# Altium PCB NavigaionBoard2_polygon.PcbDoc
Units mil, origin at the board's own origin, x right, y up, seen from the top; angles counter-clockwise.
Board outline 3645.67 x 3818.9 mil, 2 copper layers (Top Layer, Bottom Layer); 100 components, 74 nets, 445 pads, 133 vias.
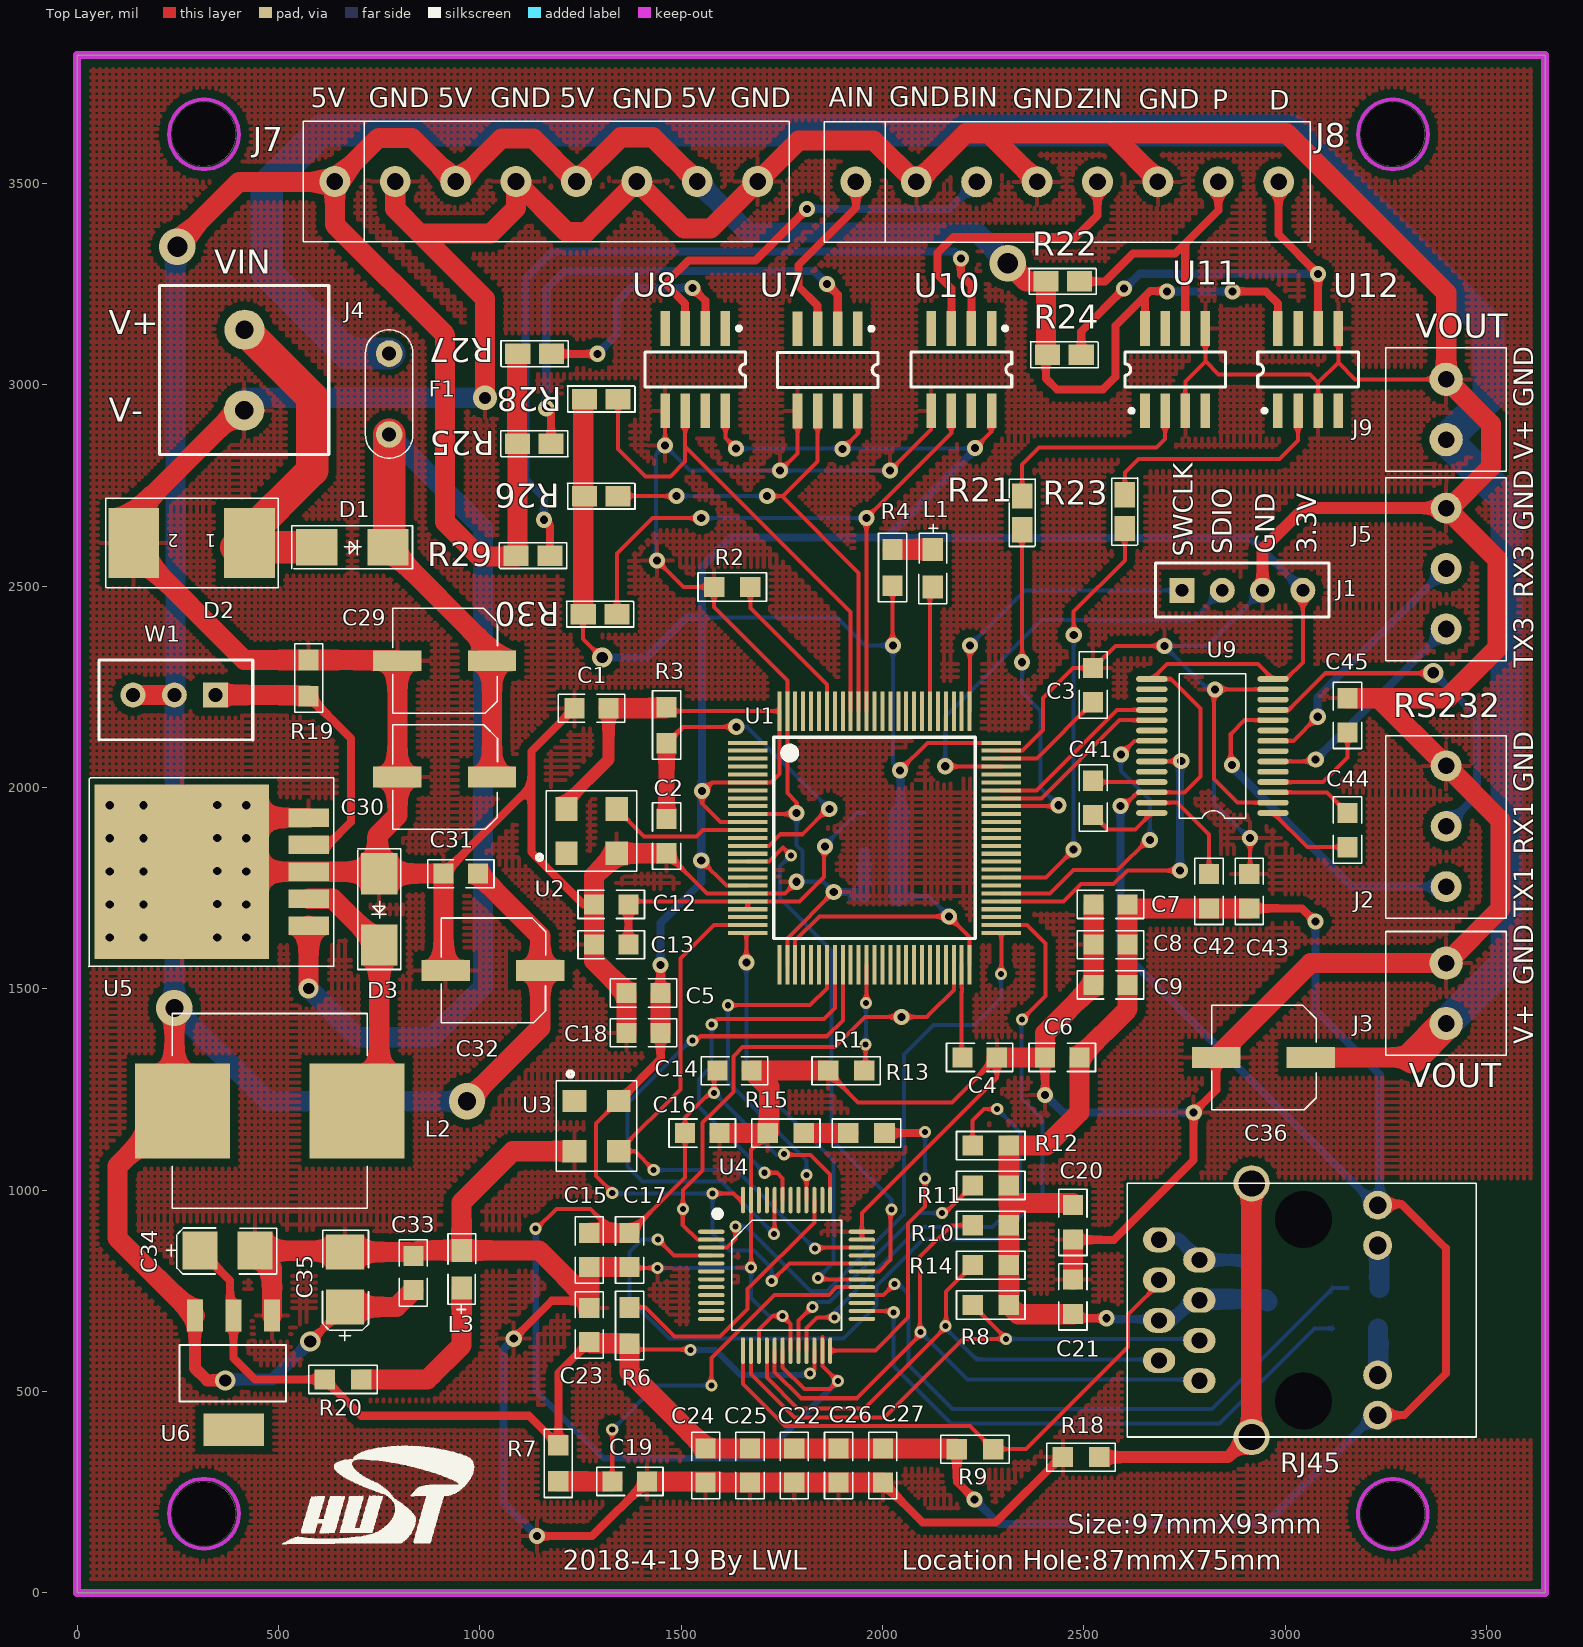
[diagram p0: Top Layer view]
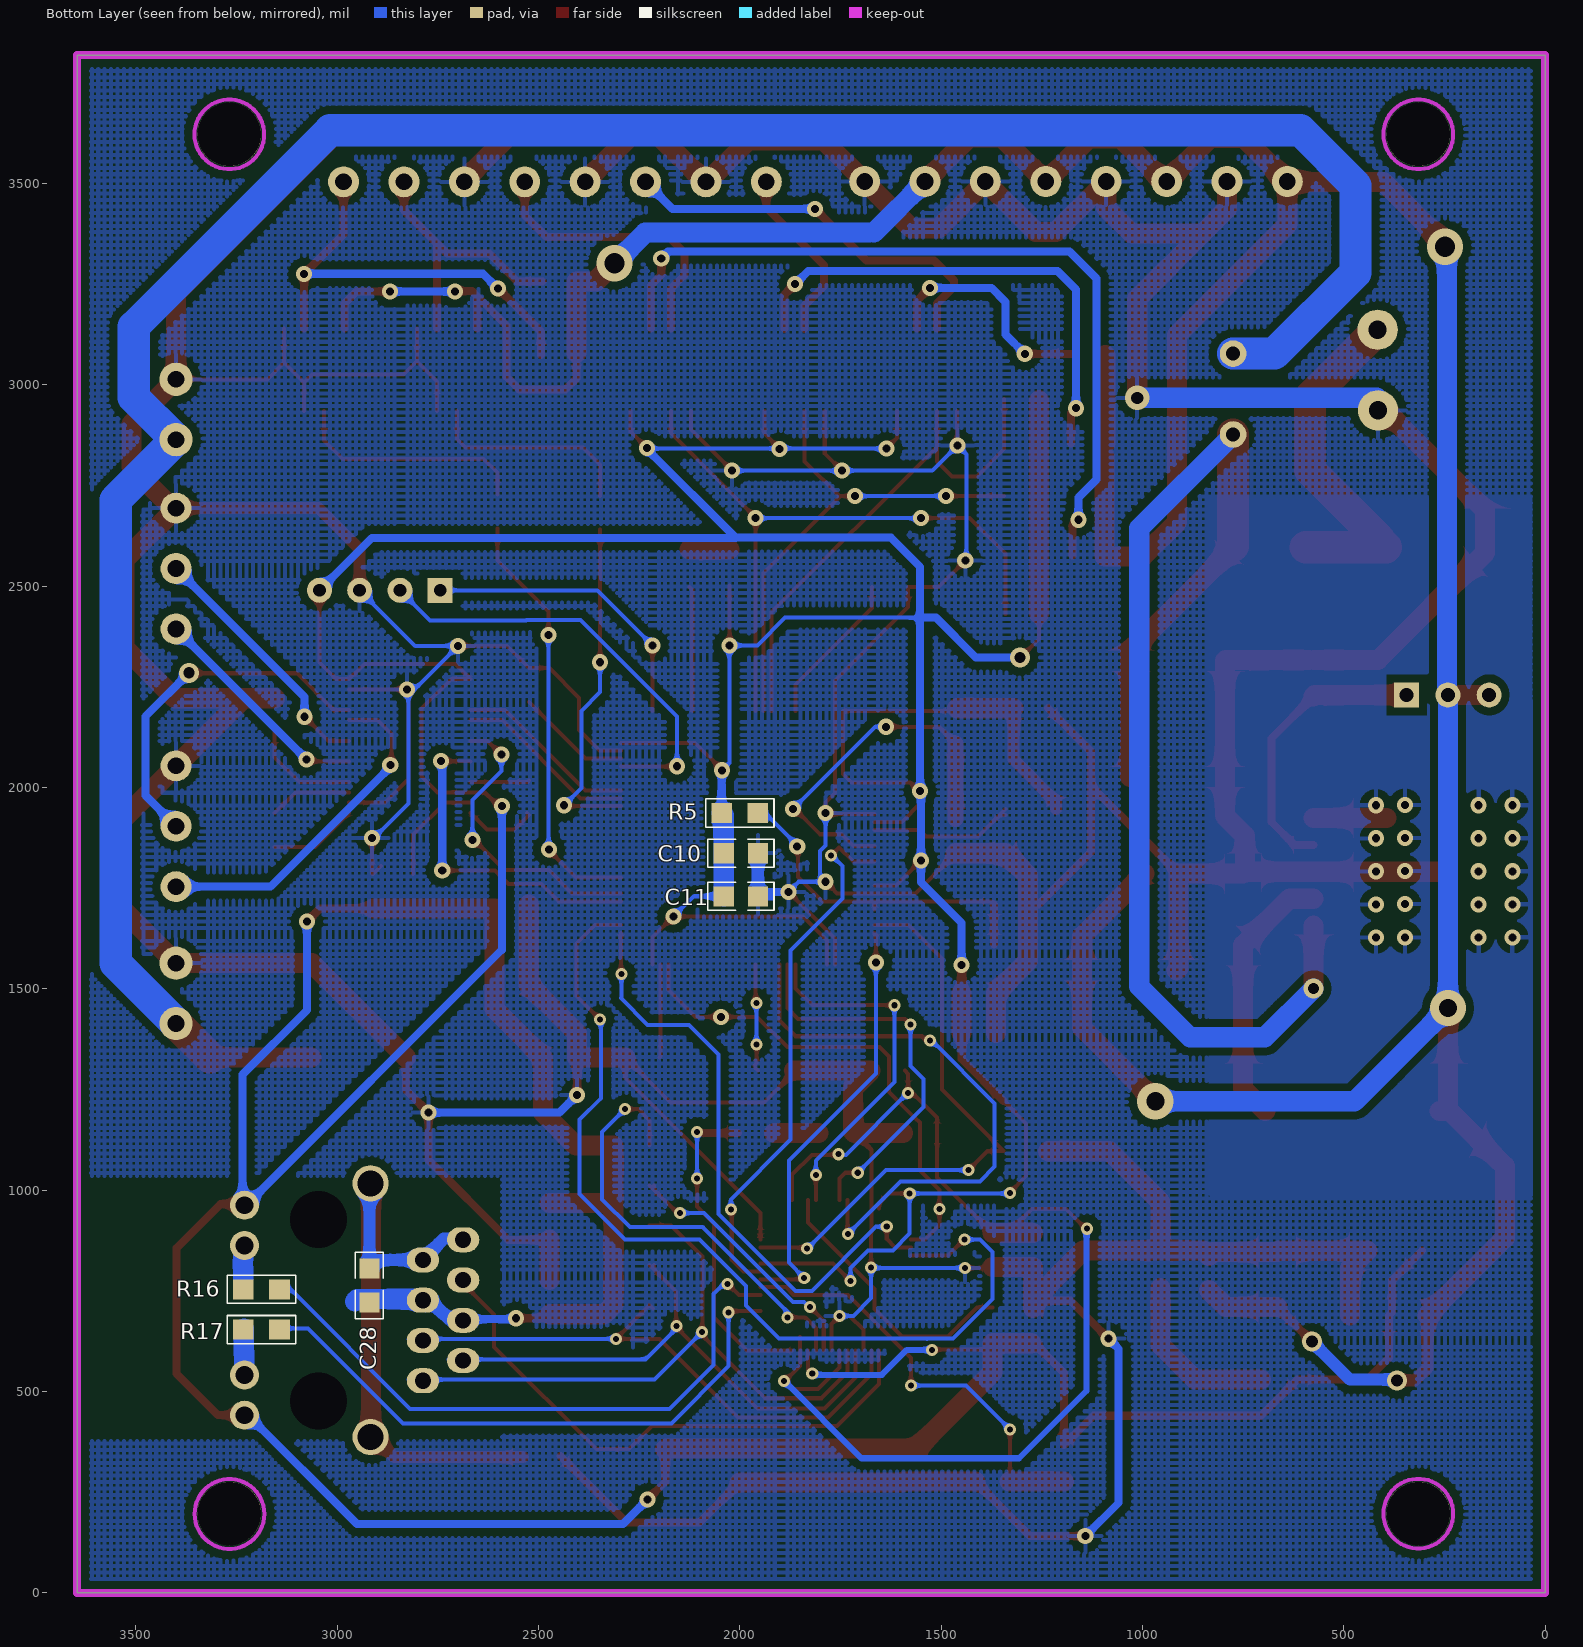
[diagram p1: Bottom Layer view, seen from below]

## Layer stack, top to bottom
Top Layer: signal copper 1.4
Dielectric: dielectric 12.6, FR-4, Dk 4.8
Bottom Layer: signal copper 1.4

## Board outline
0,0 0,3818.9 3645.67,3818.9 3645.67,0

## Design rules (kind name [scope] priority, off if disabled: settings)
Clearance PolyClearance [inpolygon] p1: gap=20
Clearance ViaToVia [isvia vs isvia] p2: gap=30
Clearance [All] p3: gap=8
HoleSize [All] p1: absolutevalues=TRUE maxlimit=196.85 minlimit=1 maxpercent=80.000 minpercent=20.000
PolygonConnect [All] p1: connectstyle=Relief reliefconductorwidth=10 reliefentries=4 polygonreliefangle="90 Angle"
RoutingVias [All] p1: holewidth=20 width=40 viastyle="Through Hole" minholewidth=15 minwidth=30 maxholewidth=50 maxwidth=90
SilkToSilkClearance [All] p1: silktosilkclearance=5
SilkscreenOverComponentPads [IsPad] p1: minsilkscreentomaskgap=5
SolderMaskExpansion [All] p1: expansion=4
Width Width_NETC36_1 [InNet('NetC36_1')] p1: maxlimit=100 minlimit=10 preferedwidth=40
Width Width_DC_IN [InNet('DC_IN')] p2: maxlimit=100 minlimit=10 preferedwidth=50
Width Width_5V [InNet('5V')] p3: maxlimit=100 minlimit=10 preferedwidth=50
Width Width_GND [InNet('GND')] p4: maxlimit=100 minlimit=10 preferedwidth=50
Width Width_3.3V [InNet('3.3V')] p5: maxlimit=100 minlimit=10 preferedwidth=40
Width [All] p6: maxlimit=100 minlimit=10 preferedwidth=10
25 further rules are at their usual default settings.

## Classes and differential pairs
component class serial_com: C41 C42 C43 C44 C45 U9
component class power: C29 C30 C31 C32 C33 C34 C35 C36 D1 D2 D3 F1 L2 L3 R19 R20 U5 U6 W1
component class Navigation_Controll: C28 J2 J3 J4 J5 J7 J8 J9 R16 R17 R18 RJ45
component class ethernet: C14 C15 C16 C17 C18 C19 C20 C21 C22 C23 C24 C25 C26 C27 R6 R7 R8 R9 R10 R11 R12 R13 R14 R15 U3 U4
component class cpu: C1 C2 C3 C4 C5 C6 C7 C8 C9 C10 C11 C12 C13 J1 L1 R1 R2 R3 R4 R5 U1 U2
component class QEP: R21 R22 R23 R24 R25 R26 R27 R28 R29 R30 U7 U8 U10 U11 U12

## Components (designator, comment, footprint, x,y, rotation, side; value= is the part's Value field where it differs from the comment)
C1 "CAP" CAP-0805 1234.96,2196.85 r0 top
C2 "CAP" CAP-0805 1463.96,1836.85 r90 top
C3 "CAP" CAP-0805 2523.26,2296.85 r270 top
C4 "CAP" CAP-0805 2283.96,1329.85 r180 top
C5 "CAP" CAP-0805 1363.96,1489.85 r0 top
C6 "CAP" CAP-0805 2403.96,1329.85 r0 top
C7 "CAP" CAP-0805 2523.96,1709.85 r0 top
C8 "CAP" CAP-0805 2523.96,1609.85 r0 top
C9 "CAP" CAP-0805 2523.96,1509.85 r0 top
C10 "CAP" CAP-0805 1954.96,1836.85 r0 bottom
C11 "CAP" CAP-0805 1954.96,1729.85 r0 bottom
C12 "CAP" CAP-0805 1283.96,1709.85 r0 top
C13 "CAP" CAP-0805 1283.96,1609.85 r0 top
C14 "CAP" CAP-0805 1674.96,1296.85 r180 top
C15 "CAP" CAP-0805 1271.96,808.85 r90 top
C16 "CAP" CAP-0805 1594.96,1141.85 r180 top
C17 "CAP" CAP-0805 1371.96,808.85 r90 top
C18 "CAP" CAP-0805 1363.96,1390.85 r0 top
C19 "CAP" CAP-0805 1414.96,276.85 r180 top
C20 "CAP" CAP-0805 2472.96,877.85 r90 top
C21 "CAP" CAP-0805 2472.96,777.85 r270 top
C22 "CAP" CAP-0805 1780.96,273.85 r90 top
C23 "CAP" CAP-0805 1271.96,707.85 r270 top
C24 "CAP" CAP-0805 1560.96,273.85 r90 top
C25 "CAP" CAP-0805 1670.96,273.85 r90 top
C26 "CAP" CAP-0805 1890.96,273.85 r90 top
C27 "CAP" CAP-0805 2000.96,273.85 r90 top
C28 "CAP" CAP-0805 2920,806 r270 bottom
C29 "CAP 330uF" ECAP_S 1030.26,2314.85 r180 top
C30 "CAP 330uF" ECAP_S 1030.26,2026.15 r180 top
C31 "CAP" CAP-0805 910.26,1786.15 r0 top
C32 "CAP 330uF" ECAP_S 1150.26,1546.15 r180 top
C33 "CAP" CAP-0805 834.96,836.85 r270 top
C34 "CAP 10UF" CAP_B 305.26,850.15 r180 top
C35 "CAP 10UF" CAP_B 665.26,710.15 r270 top
C36 "CAP 330uF" ECAP_S 3063.96,1329.85 r180 top
C41 "CAP" CAP-0805 2523.26,2016.85 r270 top
C42 "CAP" CAP-0805 2810.96,1784.85 r270 top
C43 "CAP" CAP-0805 2910.96,1784.85 r270 top
C44 "CAP" CAP-0805 3154.96,1936.85 r270 top
C45 "CAP" CAP-0805 3154.96,2136.85 r90 top
D1 "SS34" DO214AC 594.96,2596.85 r0 top
D2 "SMBJ12CA" DO214AB 428,2607 r180 top
D3 "SS34" DO214AC 750.26,1786.15 r270 top
F1 "400mA" MF_R030 774.96,2876.85 r90 top
J1 "HDR1*4" HDR1*4 2743.96,2489.85 r0 top
J2 "DG3P" DG381-3P 3399.96,1753.85 r0 top
J3 "DG2P" DG381-2P 3399.96,1413.85 r0 top
J4 "DG2P" DG508-2P 414.96,2936.85 r0 top
J5 "DG3P" DG381-3P 3399.96,2393.85 r0 top
J7 "HDR1*8" KF128L-8P 640,3505 r270 top
J8 "HDR1*8" KF128L-8P 1934,3504 r270 top
J9 "DG2P" DG381-2P 3399.96,3013.85 r180 top
L1 "LED" LED-0805 2125.26,2591.15 r270 top
L2 "INDUCTOR" PWR_L 694.96,1196.85 r180 top
L3 "LED" LED-0805 954.96,756.85 r90 top
R1 "RES" RES-0805 1954.96,1296.85 r180 top
R2 "RES" RES-0805 1672,2498 r180 top
R3 "RES" RES-0805 1463.96,2109.85 r90 top
R4 "RES" RES-0805 2025.26,2501.15 r90 top
R5 "RES" RES-0805 1954.96,1936.85 r0 bottom
R6 "RES" RES-0805 1371.96,708.85 r270 top
R7 "RES" RES-0805 1194.96,276.85 r90 top
R8 "RES" RES-0805 2313.96,714.85 r180 top
R9 "RES" RES-0805 2274.96,356.85 r180 top
R10 "RES" RES-0805 2313.96,912.85 r180 top
R11 "RES" RES-0805 2313.96,1011.85 r180 top
R12 "RES" RES-0805 2313.96,1110.85 r180 top
R13 "RES" RES-0805 1914.96,1141.85 r0 top
R14 "RES" RES-0805 2223.96,813.85 r0 top
R15 "RES" RES-0805 1714.96,1141.85 r0 top
R16 "RES" RES-0805 3142.96,753.85 r0 bottom
R17 "RES" RES-0805 3142.96,653.85 r0 bottom
R18 "RES" RES-0805 2448,337 r0 top
R19 "RES" RES-0805 574.96,2316.85 r270 top
R20 "RES" RES-0805 705.26,530.15 r180 top
R21 "RES" 0805 2347,2637 r90 top
R22 "RES" 0805 2493,3257 r180 top
R23 "RES" 0805 2602,2640 r90 top
R24 "RES" 0805 2497,3075 r180 top
R25 "RES" 0805 1090,2854 r0 top
R26 "RES" 0805 1347,2724 r180 top
R27 "RES" 0805 1091,3077 r0 top
R28 "RES" 0805 1347,2965 r180 top
R29 "RES" 0805 1087,2576 r0 top
R30 "RES" 0805 1344,2431 r180 top
RJ45 "HR91115A" RJ45_ISO 2786.96,526.85 r90 top (schematic designator J6)
U1 "STM32F407VGT6" STM32-LQFP100 1665.26,2111.15 r0 top
U2 "8MHZ" OSC_S 1214.96,1836.85 r0 top
U3 "OSC" OSC_S 1234.96,1221.85 r270 top
U4 "DP83848" LQFP48 1574.96,896.85 r0 top
U5 "LM2596" TO263 574.96,1656.85 r90 top
U6 "AMS117-3V3" AMS1117 485.26,690.15 r180 top
U7 "6N136" SOP8 1864,3037 r180 top
U8 "6N136" SOP8 1535,3038 r180 top
U9 "MAX3237" SSOP28 2969.96,1936.85 r180 top
U10 "6N136" SOP8 2196,3038 r180 top
U11 "6N136" SOP8 2727,3038 r0 top
U12 "6N136" SOP8 3057,3038 r0 top
W1 "RESPOT" RESPOT1 343.96,2229.85 r90 top

## Footprints (in the part's own frame and the unit in brackets; to place one, negate y for a bottom-side part, rotate by r counter-clockwise, add the part's x,y. Pads: shape width x height; smd on the part's side, far side on the other; paste and mask are expansions set on the pad)
0805 [mm]
  rect 1.586x1.294 smd: 1(0.085,0.005) 2(2.215,0.005)
  silkscreen extent -0.97,-0.81 3.28,0.82
AMS1117 [mil]
  rect 40x80 smd: 1(1,1) 2(97,1) 3(193,1)
  rect 150x80 smd: 4(96,285)
  silkscreen extent -34,75 231,215
CAP-0805 [mil]
  rect 50x50 smd: 1(0,0) 2(85,0)
  silkscreen extent -40,-35 125,35
CAP_B [mm]
  rect 2.2x2.4 smd: 1(0,0) 2(-3.465,0.01)
  silkscreen extent -4.83,-1.42 2.14,1.49
DG381-2P [mm]
  round 2.1 hole 1.05: 1(0,0) 2(0,3.81)
  silkscreen extent -3.8,-2 3.8,5.81
DG381-3P [mm]
  round 1.95 hole 1.05: 1(0,0) 2(0,3.81) 3(0,7.62)
  silkscreen extent -3.8,-2 3.8,9.53
DG508-2P [mil]
  round 100 hole 45: 1(0,0) 2(1,200)
  silkscreen extent -210,-110 210,310
DO214AB [mm]
  rect 3.2x4.4 smd: 1(0,0) 2(7.305,0)
  silkscreen extent -1.82,-2.84 9.05,2.82
DO214AC [mm]
  rect 2.6x2.3 smd: 1(0,0) 2(4.505,0)
  silkscreen extent -1.58,-1.35 6.04,1.35
ECAP_S [mil]
  rect 120x52 smd: 1(0,0) 2(235,0)
  silkscreen extent -14,-130 246,130
HDR1*4 [mil]
  rect 62x62 hole 32: 1(0,0)
  round 62 hole 32: 2(100,0) 3(200,0) 4(300,0)
  silkscreen extent -66,-66 365,68
KF128L-8P [mm]
  round 1.95 hole 1.05: 1(0,0) 2(0,3.81) 3(0,7.62) 4(0,11.43) 5(0,15.24) 6(0,19.05) 7(0,22.86) 8(0,26.67)
  silkscreen extent -3.8,-2 3.8,28.67
LED-0805 [mm]
  rect 1.45x1.3 smd: 1(0,0) 2(2.379,0)
  silkscreen extent -1.6,-0.89 3.43,0.86
LQFP48 [mil]
  oval 66x10 smd: 1(0,0) 2(0,-19.68) 3(0,-39.37) 4(0,-59.06) 5(0,-78.74) 6(0,-98.42) 7(0,-118.11) 8(0,-137.8) 9(0,-157.48) 10(0,-177.16) 11(0,-196.85) 12(0,-216.54) 25(374.01,-216.54) 26(374.01,-196.85) 27(374.01,-177.16) 28(374.01,-157.48) 29(374.01,-137.8) 30(374.01,-118.11) 31(374.01,-98.42) 32(374.01,-78.74) 33(374.01,-59.06) 34(374.01,-39.37) 35(374.01,-19.68) 36(374.01,0)
  oval 10x66 smd: 13(78.74,-295.28) 14(98.42,-295.28) 15(118.11,-295.28) 16(137.79,-295.28) 17(157.48,-295.28) 18(177.16,-295.28) 19(196.85,-295.28) 20(216.53,-295.28) 21(236.22,-295.28) 22(255.9,-295.28) 23(275.59,-295.28) 24(295.27,-295.28) 37(295.27,78.74) 38(275.59,78.74) 39(255.9,78.74) 40(236.22,78.74) 41(216.53,78.74) 42(196.85,78.74) 43(177.16,78.74) 44(157.48,78.74) 45(137.79,78.74) 46(118.11,78.74) 47(98.42,78.74) 48(78.74,78.74)
  silkscreen extent 8,-245 323,53
MF_R030 [mm]
  round 1.68 hole 0.886: 1(0,0) 2(5.1,0)
  silkscreen extent -1.5,-1.5 6.6,1.5
OSC_S [mm]
  rect 1.4x1.5 smd: 1(0,0) 2(3.175,0) 3(3.175,2.794) 4(0,2.794)
  silkscreen extent -1.86,-1.14 4.45,3.94
PWR_L [mm]
  rect 6x6 smd: 1(0,0) 2(11,0)
  silkscreen extent -0.65,-6.15 11.65,6.15
RES-0805 [mm]
  rect 1.3x1.27 smd: 1(0,0) 2(2.286,0)
  silkscreen extent -1.02,-0.89 3.3,0.89
RESPOT1 [mil]
  rect 62x62 hole 35 paste+0: 1(0,0)
  round 62 hole 35: 2(0,205) 3(0,102.5)
  silkscreen extent -111,-92 87,290
RJ45_ISO [mil]
  round 70.8 hole 141.73: 0(-50.39,-259.05)
  round 60 hole 141.73: 0(400.39,-259.05)
  oval 62x80 hole 40: 1(0,0) 2(50,100) 3(100,0) 4(150,100) 5(200,0) 6(250,100) 7(300,0) 8(350,100)
  round 72 hole 44: 9(-85.63,-442.91) 10(14,-442.91) 11(335.87,-442.91) 12(436,-442.91)
  round 90 hole 65: 13(-139.76,-129.92) 14(490.16,-129.92)
  silkscreen extent -140,-687 490,179
SOP8 [mm] "Small Outline; 8 Leads; Body Width 4.3 mm; Pitch 1.27 mm"
  rect 0.6x2.2 smd: 1(-1.905,-2.6) 2(-0.635,-2.6) 3(0.635,-2.6) 4(1.905,-2.6) 5(1.905,2.6) 6(0.635,2.6) 7(-0.635,2.6) 8(-1.905,2.6)
  silkscreen extent -3.17,-2.72 3.17,1.1
SSOP28 [mm]
  oval 1.98x0.36 smd: 1(0,0) 2(0,-0.65) 3(0,-1.3) 4(0,-1.95) 5(0,-2.6) 6(0,-3.25) 7(0,-3.9) 8(0,-4.55) 9(0,-5.2) 10(0,-5.85) 11(0,-6.5) 12(0,-7.15) 13(0,-7.8) 14(0,-8.45) 15(7.65,-8.45) 16(7.65,-7.8) 17(7.65,-7.15) 18(7.65,-6.5) 19(7.65,-5.85) 20(7.65,-5.2) 21(7.65,-4.55) 22(7.65,-3.9) 23(7.65,-3.25) 24(7.65,-2.6) 25(7.65,-1.95) 26(7.65,-1.3) 27(7.65,-0.65) 28(7.65,0)
  silkscreen extent 1.73,-8.78 5.92,0.33
STM32-LQFP100 [mm]
  rect 2.5x0.254 smd: 1(0,0) 2(0,-0.5) 3(0,-1) 4(0,-1.5) 5(0,-2) 6(0,-2.5) 7(0,-3) 8(0,-3.5) 9(0,-4) 10(0,-4.5) 11(0,-5) 12(0,-5.5) 13(0,-6) 14(0,-6.5) 15(0,-7) 16(0,-7.5) 17(0,-8) 18(0,-8.5) 19(0,-9) 20(0,-9.5) 21(0,-10) 22(0,-10.5) 23(0,-11) 24(0,-11.5) 25(0,-12) 51(16,-12) 52(16,-11.5) 53(16,-11) 54(16,-10.5) 55(16,-10) 56(16,-9.5) 57(16,-9) 58(16,-8.5) 59(16,-8) 60(16,-7.5) 61(16,-7) 62(16,-6.5) 63(16,-6) 64(16,-5.5) 65(16,-5) 66(16,-4.5) 67(16,-4) 68(16,-3.5) 69(16,-3) 70(16,-2.5) 71(16,-2) 72(16,-1.5) 73(16,-1) 74(16,-0.5) 75(16,0)
  rect 0.254x2.5 smd: 26(2,-14) 27(2.5,-14) 28(3,-14) 29(3.5,-14) 30(4,-14) 31(4.5,-14) 32(5,-14) 33(5.5,-14) 34(6,-14) 35(6.5,-14) 36(7,-14) 37(7.5,-14) 38(8,-14) 39(8.5,-14) 40(9,-14) 41(9.5,-14) 42(10,-14) 43(10.5,-14) 44(11,-14) 45(11.5,-14) 46(12,-14) 47(12.5,-14) 48(13,-14) 49(13.5,-14) 50(14,-14) 76(14,2) 77(13.5,2) 78(13,2) 79(12.5,2) 80(12,2) 81(11.5,2) 82(11,2) 83(10.5,2) 84(10,2) 85(9.5,2) 86(9,2) 87(8.5,2) 88(8,2) 89(7.5,2) 90(7,2) 91(6.5,2) 92(6,2) 93(5.5,2) 94(5,2) 95(4.5,2) 96(4,2) 97(3.5,2) 98(3,2) 99(2.5,2) 100(2,2)
  silkscreen extent 1.65,-12.35 14.35,0.35
TO263 [mm]
  rect 11x11 smd: 0(3.4,8)
  rect 1.168x2.54 smd: 1(0,0) 2(1.7,0) 3(3.4,0) 4(5.1,0) 5(6.8,0)
  silkscreen extent -2.57,-1.6 9.34,13.87

## Part data
D2: library part SMBJ30CA
F1: library part MF_R030
RJ45: library part NET_PORT
U2: library part OSC
U5: library part LM2576/96
U7 U8 U10 U11 U12: library part Component_1

## Free pads (board coordinates)
  round 157.48 hole 157.48: 1(314.96,196.85) 2(3267.72,196.85) 3(3267.72,3622.05) 4(314.96,3622.05)

## Via types
v1: diameter 40, hole 20, Top Layer to Bottom Layer, 80 vias
v2: diameter 30, hole 15, Top Layer to Bottom Layer, 43 vias
v3: diameter 50, hole 28, Top Layer to Bottom Layer, 3 vias
v4: diameter 90, hole 50, Top Layer to Bottom Layer, 2 vias
v5: diameter 50, hole 30, Top Layer to Bottom Layer, 2 vias
v6: diameter 90, hole 45, Top Layer to Bottom Layer, 2 vias
v7: diameter 60, hole 30, Top Layer to Bottom Layer, 1 vias

## Nets (pads, with @x,y where several pads share a name; then routed paths per layer and width w, separated by ;. In a path a pad name is that pad's centre, name@x,y a point inside that pad or via, vN(x,y) a via of type N, cw(c..) or ccw(c..) an arc to the next point about the centre after c; other vN are vias at no path point)
3.3V: C1.2 C5.2 C6.2 C7.2 C8.2 C9.2 C10.2 C11.2 C18.2 C20.2 C21.2 C22.2 C23.2 C24.2 C25.2 C26.2 C27.2 C28.2 C34.1 C42.2 C43.2 J1.4 R3.2 R4.1 R5.2 R6.2 R7.2 R8.1 R9.2 R10.1 R11.1 R12.1 R14.2 R20.2 R26.2 R28.2 R30.2 RJ45.4 RJ45.5 RJ45.9 RJ45.12 U1.6 U1.11 U1.19 U1.28 U1.50 U1.75 U1.100 U2.4 U3.4 U4.22 U4.32 U4.48 U6.2 U7.8 U8.8 U9.14 U9.15 U9.26 U10.8 | length 20886.4
  Top Layer w10: R30.2 1256.8,2369.2 v3@1303,2323 ; v2(1328.96,992.85) 1328.96,994.85 1288.96,1034.85 1288.96,1165.85 U3.4 ; R6.2 1386.44,604.37 v2@1523,604.37 ; R3.2@1460.96,2196.85 R3.2 1473.92,2189.89 U1.100 1744,2033.89 1722.83,2012.72 U1.6 1576.83,2012.72 v1@1558.46,1994.35 ; v1(1549.96,1819.21) 1612.35,1756.82 U1.19 ; v1@1551.96,2000.85 v1(1551.96,1991.85) 1551.96,1959.85 1597.51,1914.3 U1.11 ; v2(1578,991.85) 1630.52,991.85 U4.48@1650.24,972.13 ; U8.8 1610,2868 v1(1636,2842) ; U4.48@1653.7,954.11 U4.48@1653.7,968.67 ; v2(1725,774.37) 1768.74,818.11 U4.32 ; U1.28 1783.37,1619.91 1843.31,1679.85 v1(2164.96,1679.85) 2216.44,1628.37 U1.50 ; v2(1820,544.37) 1830.87,555.24 U4.22 ; v1(1901,2841) 1939,2879 U7.8 ; R4.1 2025.26,2353.55 v1(2025.96,2352.85) ; v1@2043.46,2043.35 2111.26,2111.15 U1.75 ; v1(2230,2843) 2271,2884 U10.8 ; C7.2@2597.96,1720.85 2608.96,1699.85 2608.96,1680.85 ; v1@2606.96,1961.85 2633.14,1988.03 U9.26 2750.14,1988.03 2789.96,2027.85 2789.96,2195.85 2716.28,2269.53 U9.15 2706.25,2307 2932.49,2307 U9.14 3002.53,2269.53 3043.96,2310.96 J1.4
  Top Layer w20: C34.1 379.96,775.45 379.96,697.45 U6.2 388.26,583.55 441.66,530.15 R20.2 705.56,439.85 1077.96,439.85 ; 1088.96,439.85 1077.96,439.85 ; C23.2 1194.96,545.85 R7.2 1121.96,439.85 1077.96,439.85 ; U3.4 1448.96,1325.85 C18.2 ; C5.2 v1(1448.96,1558.85) ; R9.2 2184.96,275.85 v1(2228.9,231.91) v1@2236.46,224.35 ; C21.2 2483.81,682 v1(2556,682) ; C43.2 3042.15,1699.85 v1(3075,1667) ; RJ45.9 3295.87,441.22 3399,544.35 3399,856 3289.15,965.85 RJ45.12@3229.87,965.85
  Top Layer w30: U2.4 1214.96,1964.85 1319.96,2069.85 C1.2
  Top Layer w50: R30.2 R28.2@1256.8,2961.8 ; C23.2@1275.96,619.85 R6.2@1371.96,619.85 ; C1.2 R3.2@1460.96,2196.85 ; R6.2 1371.96,547.85 C24.2 C25.2 C22.2 C26.2 C27.2 2182.96,358.85 R9.2 ; C18.2 C5.2 ; C21.2@2472.96,691.85 2336.96,691.85 R8.1 R14.2 R10.1 2313.96,958.85 ; C20.2@2472.96,967.85 2322.96,967.85 2313.96,958.85 ; 2608.96,1680.85 C8.2 C9.2 2608.96,1449.85 C6.2 2488.96,1192.85 2406.96,1110.85 R12.1 R11.1 2313.96,958.85 ; C7.2@2608.96,1699.85 C42.2@2800.96,1699.85 ; C42.2 C43.2
  Bottom Layer w10: v2(1328.96,992.85) 1329.96,991.85 v2(1578,991.85) ; v1@1549.96,1984.85 1551.96,1986.85 v1(1551.96,1991.85) v1@1551.96,2000.85 ; 1551.96,2422 1887.37,2422 1956.52,2352.85 v1(2025.96,2352.85) 2025.96,2060.85 v1(2043.96,2042.85) ; v2@1578,977.37 v2(1578,991.85) ; v1(1636,2842) v1@2231,2842 ; v2(1725,774.37) 1725,806.37 1681,850.37 1620,850.37 1578,892.37 v2(1578,991.85) ; C11.2 2114.96,1729.85 v1(2164.96,1679.85) ; R5.2 R5.2@2044.96,1950.85
  Bottom Layer w15: v2(1523,603.37) 1585,603.37 1647,541.37 v2@1820,541.37
  Bottom Layer w20: v3(1304,2323) 1414,2323 1513,2422 1556,2422 ; v1(1448.96,1558.85) 1448.96,1663.85 1549.96,1764.85 v1(1549.96,1819.21) v1@1549.96,1984.85 ; v1(1551.96,1991.85) 1551.96,2421.37 ; 1551.96,2422 1551.96,2547.96 1625,2621 2011,2621 v1@2230,2840 ; 2011,2620 2913.81,2620 J1.4 ; v1(2043.96,2042.85) 2044.96,2041.85 R5.2 ; v1(2228.9,231.91) 2289.96,170.85 2950.85,170.85 RJ45.9@3224.22,444.22 ; v1@2558.15,679.85 RJ45.4@2722.96,679.85 ; v1(2590.96,1953.85) 2590.96,1597.04 3235,953 3235,1287 3075,1447 v1(3075,1667)
  Bottom Layer w30: v1(2556,682) v1@2558.15,679.85 ; RJ45.4@2722.96,679.85 2772.96,729.85 RJ45.5@2822.96,729.85
  Bottom Layer w50: C11.2 C10.2 2039.96,1931.85 R5.2 ; RJ45.5@2822.96,729.85 2950.15,729.85 2956,724
5V: C31.2 C32.1 C33.2 C35.1 J7.1 J7.3 J7.5 J7.7 L2.2 R22.2 R24.2 R25.1 R27.1 R29.1 U6.3 U11.8 U12.8 W1.2 W1.3 | length 10592.7
  Top Layer w20: v5(578.96,623.85) C35.1 ; R24.2@2405.8,3078.8 2405.8,3016.2 2433,2989 2548,2989 2579,3020 2579,3147 2652,3220 ; U11.8 2652,3220 ; v1@2706,3233 2665,3233 2652,3220 ; v1(2869,3232) 2952,3232 2982,3202 U12.8
  Top Layer w30: U6.3 292.26,558.55 322.96,527.85 v5(367.96,527.85)
  Top Layer w50: W1.2 W1.3 ; v6(241.46,1452.35) 241.46,1204.35 L2.2@248.96,1196.85 ; v4@248.96,3350.96 402,3504 J7.1@649,3504 ; L2.2 L2.2@248.96,1196.85 ; U6.3 99.96,881.45 99.96,1059.85 236.96,1196.85 L2.2@248.96,1196.85 ; C35.1 793.26,710.15 C33.2 ; 823,3613 748,3613 J7.1 640,3398 914,3124 914,2659 998.8,2574.2 1094,2574.2 1094,2823 ; 832,3613 943.5,3501.5 1054,3612 1133,3612 J7.5 1350,3615 1430,3615 J7.7 ; v6(967.96,1220.85) 1150.26,1403.15 C32.1 1150.26,1631.15 C31.2 ; R25.1@1092.35,2854.2 R27.1@1092.35,3074.2 ; v4(2311,3302) 2356.2,3256.8 R22.2 R24.2@2405.8,3078.8
  Bottom Layer w20: v1(2707,3232) v1(2869,3232)
  Bottom Layer w30: v5@369.96,529.85 484.96,529.85 v5(578.96,623.85)
  Bottom Layer w50: W1.3 v6(241.46,1452.35) 472.96,1220.85 v6(967.96,1220.85) ; W1.3@243.96,2229.85 v4@243.96,3329.85 ; J7.7 1667,3378 ; 1678,3378 2235,3378 v4@2309.5,3303.5
  other v4: 248.96,3342.85
AIN: J8.1 U7.3 | length 443.8
  Top Layer w20: U7.3 1839,3197 1791,3245 1791,3297 1934,3440 J8.1
BIN: J8.3 U8.3 | length 1003.5
  Top Layer w20: U8.3 1510,3202 1468,3244 1468,3259 1518,3309 1685,3309 v1(1813,3437)
  Bottom Layer w20: v1(1813,3437) 2167,3437 J8.3
CLK_8M: U1.12 U2.3 | length 387.5
  Top Layer w10: U2.3@1339.96,1932.32 cw(c1339.96,1897.25) U2.3@1364.76,1922.05 ; U2.3 1407.96,1878.85 1537.96,1878.85 1553.72,1894.61 U1.12
CLK_50M: U1.24 U3.3 U4.34 | length 1437.3
  Top Layer w10: v2@1429.96,1051.85 v2(1431.96,1049.85) ; v2@1430.96,1049.85 v2(1431.96,1049.85) ; U1.24 1581.5,1658.39 1498,1574.89 1498,1249.89 U3.3 1384.96,1096.85 v2(1431.96,1049.85) ; v2@1846.96,856.85 1847.59,857.48 U4.34
  Bottom Layer w10: v2(1431.96,1049.85) 1636.96,1049.85 v2@1832.46,854.35
  other v2: 1832.96,854.85
CRS_DV: U1.32 U4.40 | length 891.3
  Top Layer w10: v2@1615,1459.37 1820,1459.37 1862.11,1501.48 U1.32 ; U4.40 1811.18,1014.55 ; v2(1811.18,1037.65) 1811.18,1014.55 ; 1812,1015.37 1811.18,1014.55
  Bottom Layer w10: v2(1616,1459.37) 1616,1268.37 1811.18,1073.19 v2(1811.18,1037.65) v2@1811.18,1035.19
DC_IN: C29.1 C30.1 D1.2 F1.1 U5.1 | length 3113.7
  Top Layer w50: v3(574.96,1500.85) U5.1 ; D1.2 1030.26,2338.91 C29.1 C30.1
  Top Layer w80: D1.2@774.96,2599.49 F1.1
  Bottom Layer w50: v3(574.96,1500.85) 695.96,1379.85 881.96,1379.85 1007.96,1505.85 1007.96,2643.85 F1.1
DIR_OUT: J8.8 R24.1 U12.6 | length 1108.8
  Top Layer w20: R24.1 2493.65,3132.65 v1(2600,3239) ; J8.8 2984,3373 v1(3082,3275) U12.6
  Bottom Layer w20: v1@2601,3239 2638,3276 v1@3082,3276
GND: C1.1 C2.1 C3.1 C4.1 C5.1 C6.1 C7.1 C8.1 C9.1 C10.1 C11.1 C12.1 C13.1 C14.1 C15.1 C16.1 C17.1 C18.1 C19.1 C20.1 C21.1 C22.1 C23.1 C24.1 C25.1 C26.1 C27.1 C29.2 C30.2 C31.1 C32.2 C33.1 C34.2 C35.2 C36.2 C43.1 C45.2 D2.2 D3.1 J1.3 J2.3 J3.2 J4.1 J5.3 J7.2 J7.4 J7.6 J7.8 J8.2 J8.4 J8.6 J9.1 L3.2 R1.2 R2.2 R15.1 R18.1 R19.1 U1.10 U1.20 U1.27 U1.74 U1.99 U2.2 U3.2 U4.15 U4.19 U4.35 U4.36 U4.47 U5.0 U5.3 U5.5 U6.1 U7.5 U8.5 U9.2 U9.13 U10.5 U11.3 U11.5 U12.3 U12.5 | length 27415.2
  Top Layer w10: C17.1 1373.96,806.85 v2(1440.96,806.85) ; v1(1440,2564) 1506,2498 R2.2 1582,2448 1763.68,2266.32 U1.99 1763.68,1985.85 1786.96,1962.57 v1(1786.96,1936.85) 1784.09,1933.98 1718.96,1933.98 ; v1@1460,2855 U8.5 ; C2.1 1563.68,1737.13 U1.20 1758.13,1737.13 1771.61,1750.61 ; U1.10 1718.96,1933.98 ; v2(1673.96,808.37) U4.47 1673.39,1100.28 R15.1 ; U4.15 1693.07,653.96 1726.96,687.85 v2(1751.96,687.85) 1771.81,668 U4.19 ; R15.1@1714.96,1150.85 R15.1 ; R15.1@1718.96,1145.85 R15.1 ; 1728.09,1933.98 1718.96,1933.98 ; v1(1746,2787) 1789,2830 U7.5 ; U1.27 1763.68,1625.68 v1(1879,1741) ; R1.2@1855.96,1309.85 R1.2@1873.96,1309.85 ; 1913.64,1244.17 1939.81,1218 2172.11,1218 C4.1 2283.96,1278.96 1948.98,943.98 U4.36 U4.35 ; v1(2019,2787) 2121,2889 U10.5 ; U1.74 2348.09,2091.46 2398.96,2142.33 2398.96,2222.85 2472.96,2296.85 C3.1 2578.26,2351.85 v1(2699.96,2351.85) ; U11.3 2752,3008 2802,3058 U11.5 ; 2803,3058 2835,3026 3062,3026 3082,3006 ; v1@2822.96,2236.85 2822.96,2020.85 2881.37,1962.44 U9.2 ; v1(2826.05,2243.94) U9.13 ; C43.1@2890.96,1804.85 C43.1 2912.96,1786.85 v1(2912.96,1874.85) ; J1.3 2943.96,2557.85 ; U12.3 3082,3006 ; 3132,3055 3173.15,3013.85 J9.1 ; U12.5 3132,3056 3082,3006
  Top Layer w20: C31.1 1127.96,2003.85 ; v1(1084.3,631.19) 1178.62,725.51 C23.1@1271.96,725.51 ; v1(1141.96,140.85) 1278.96,140.85 C19.1 ; C1.1 1127.96,2089.85 1127.96,2003.85 ; C12.1 1257.96,1709.85 1127.96,1839.85 1127.96,2003.85 ; C27.1 2099.96,174.85 2280.85,174.85 R18.1@2445.5,339.5 ; v1(2403.96,1236.85) C6.1 ; C20.1@2473,876.85 2574.96,876.85 2772.96,1074.85 v1(2772.96,1192.85) 2828.96,1248.85 C36.2
  Top Layer w30: J1.3 2943.96,2591.85 3045.96,2693.85 J5.3
  Top Layer w50: U5.0 U5.3 D3.1@745.7,1790.71 ; U5.0@393.86,1924.57 U5.5 ; J4.1@397.85,2936.85 149,2688 149,2583 415.15,2316.85 R19.1 ; U6.1 484.26,807.17 C34.2 662.46,849.76 C35.2 C33.1@825.24,846.57 ; R19.1@586.96,2316.85 C29.2@793.26,2316.85 ; J7.2 790,3437 851,3376 ; C29.2 C30.2 795.26,1930.15 745.7,1880.59 D3.1@745.7,1790.71 ; C33.1 848.62,850.51 L3.2 ; C32.2 910.26,1551.15 C31.1 D3.1 D3.1@745.7,1790.71 ; v7(1013,2967.85) 1013,3214 851,3376 ; U3.2 1081.96,1096.85 954.96,969.85 L3.2 ; C23.1 C23.1@1271.96,725.51 ; C18.1 C5.1 1283.96,1569.85 C13.1 C12.1 1283.96,1780.85 U2.2 C2.1 ; C17.1 C15.1 C23.1@1271.96,725.51 ; C19.1 1593.96,276.85 1596.96,273.85 C25.1 C22.1 C26.1 C27.1 ; C16.1 R15.1 ; 1714.96,1256.85 C14.1 R1.2 ; R15.1@1718.96,1145.85 1718.96,1256.85 ; J8.2@2083.61,3501.61 1978.22,3607 1792,3607 J7.8 1573,3388 1507,3388 J7.6 1265,3380 1215,3380 J7.4 1090,3439 1027,3376 851,3376 ; J8.2@2084,3502 2207,3625 3003.81,3625 3399.96,3228.85 J9.1 3510.96,2902.85 3510.96,2795.96 J5.3@3408.85,2693.85 ; 2273,3616 J8.4@2381,3508 ; C4.1 C6.1 2403.96,1389.85 C9.1 C8.1 C7.1 ; C21.1@2473,776.85 C20.1@2473,876.85 ; 2565,3627 J8.6@2684,3508 ; C36.2 3062.96,1563.85 J3.2 3534.96,1698.85 3534.96,1918.85 J2.3 3231.96,2221.85 ; C45.2 3231.96,2221.85 ; J5.3 3527.96,2565.85 3527.96,2346.85 3402.96,2221.85 3231.96,2221.85 ; L3.2 1146.96,850.51 C23.1@1271.96,725.51
  Bottom Layer w10: v1@1437.5,2566.5 1437.5,2827.5 v1(1459.5,2849.5) 1522,2787 v1(1746,2787) v1@2018,2787 ; v2(1440.96,806.85) v2@1663.96,806.85 ; v2(1673.96,808.37) 1673.96,731.85 1717.96,687.85 v2(1751.96,687.85) ; v1(1786.96,1936.85) 1786.96,1856.64 1801,1842.6 1801,1780 v1(1787,1766) ; v1@1790,1766 v1(1787,1766) ; v1(1879,1741) 1854,1766 v1(1787,1766) ; v1@2822.96,2236.85 2822.96,1960.85 v1@2908.96,1874.85 ; v1(2826.05,2243.94) 2807.87,2243.94 v1(2699.96,2351.85) 2805.96,2351.85 J1.3
  Bottom Layer w20: J4.1@419.96,2936.85 J4.1@427.96,2944.85 ; v1(1084.3,631.19) 1058.96,605.85 1058.96,223.85 v1(1141.96,140.85) ; v1@1885,1741 1943.81,1741 C11.1 ; v1(2403.96,1236.85) 2447.96,1192.85 v1(2772.96,1192.85)
  Bottom Layer w30: C11.1 C10.1
  Bottom Layer w50: J4.1@417.96,2967.85 v7(1013,2967.85)
  other v1: 81,1628 165,1628 348,1628 420,1628 81,1710 165,1710 420,1710 348,1711 81,1792 165,1792 420,1792 348,1793 81,1874 165,1874 420,1874 348,1875 81,1956 165,1956 420,1956 348,1957
LED: L1.2 U1.81 | length 310.6
  Top Layer w10: U1.81 2118.02,2490.24 L1.2
LED_ACT: R17.2 RJ45.10 | length 116
  Bottom Layer w50: RJ45.10@3231,540.85 R17.2@3231,656.85
LED_LINK: R16.2 RJ45.11 | length 105.9
  Bottom Layer w50: R16.2@3234,756.85 RJ45.11@3234,862.72
MDC: U1.16 U4.31 | length 1344
  Top Layer w10: U1.16 1718.17,1815.87 1753.15,1850.85 v2(1773,1831) ; U4.31 1991.06,798.43 2019.96,827.33 v2@2019.96,951.85
  Bottom Layer w10: v2@1772.06,1831.94 1745,1804.89 1745,1724.14 1874,1595.14 1874,1125.37 2021.96,977.41 v2(2021.96,951.85)
MDIO: U1.25 U4.30 | length 1072.6
  Top Layer w10: v1(1661.96,1565.37) 1661.96,1635.41 U1.25 ; v2(1840,782) 1843.26,778.74 U4.30
  Bottom Layer w10: v1@1661.96,1564.37 1661.96,1289.41 1878,1073.37 1878,820 v2(1840,782)
NetC2_2: C2.2 R3.1 U1.14 | length 934.5
  Top Layer w10: R3.1 1504.96,2150.85 v1(1637,2150.85) ; U1.14 1718.17,1855.24 1747,1884.07 1747,1884 1801.11,1884 v1@1866.96,1949.85
  Top Layer w40: C2.2 R3.1
  Bottom Layer w10: v1(1637,2150.85) 1663.96,2150.85 v1(1867.96,1946.85)
NetC3_2: C3.2 U1.73 | length 286.1
  Top Layer w10: U1.73 2383.19,2071.78 C3.2
NetC4_2: C4.2 U1.49 | length 231.4
  Top Layer w10: U1.49 2196.76,1503.21 2197.14,1502.83 2197.14,1492.06 2196.76,1491.67 2196.76,1332.06 C4.2
NetC12_2: C12.2 C13.2 R5.1 U1.21 U1.22 | length 844.8
  Top Layer w10: C12.2 1376.56,1717.45 U1.21 ; U1.22 U1.21 ; v1@1855.38,1855.27 1855.38,1778.38 1794.45,1717.45 U1.21
  Top Layer w20: C13.2 C12.2
  Bottom Layer w10: v1@1855.38,1855.27 1936.96,1936.85 R5.1
  other v1: 1857.38,1853.27
NetC28_1: C28.1 R18.2 RJ45.7 RJ45.8 RJ45.13 RJ45.14 | length 1496.9
  Top Layer w30: R18.2 2858,337 RJ45.13@2916,395
  Top Layer w50: RJ45.13@2916,395 RJ45.14@2916,1017.01
  Bottom Layer w30: RJ45.8@2686.96,879.85 2735.15,879.85 RJ45.7@2785.15,829.85 ; RJ45.7 2899.15,826.85 C28.1 2920,1013.89 RJ45.14
NetC36_1: C36.1 F1.2 J3.1 J9.2 | length 6166.1
  Top Layer w50: C36.1 3315.96,1329.85
  Top Layer w80: 3315.96,1329.85 J3.1
  Bottom Layer w80: F1.2 671.73,3077.64 471,3278.37 471,3495.37 608,3632.37 3017,3632.37 3505,3144.37 3505,2968.89 J9.2 3549.96,2713.85 3549.96,1563.85 J3.1
NetC41_1: C41.1 U9.25 | length 146.9
  Top Layer w10: C41.1 2526.49,2013.62 U9.25
NetC41_2: C41.2 U9.28 | length 184.5
  Top Layer w10: C41.2@2528.26,1936.85 C41.2 2559.26,1895.85 2627.78,1895.85 U9.28
NetC42_1: C42.1 U9.27 | length 316.7
  Top Layer w10: 2712.37,1962.44 U9.27 2731.37,1962.44 2810.96,1882.85 C42.1
NetC44_1: C44.1 U9.3 | length 206.2
  Top Layer w10: U9.3 3103.78,1988.03 C44.1
NetC44_2: C44.2 U9.1 | length 220.2
  Top Layer w10: U9.1 3054.96,1851.85 C44.2
NetC45_1: C45.1 U9.4 | length 272.4
  Top Layer w10: U9.4 3093.73,2013.62 3154.96,2074.85 C45.1
NetD1_1: D1.1 D2.1 J4.2 | length 860.5
  Top Layer w80: D2.1@394.96,2596.85 D1.1 ; D2.1@412.85,2616.85 583.96,2787.96 583.96,2968.85 J4.2
NetD3_2: D3.2 L2.1 U5.2 | length 657.8
  Top Layer w50: U5.2 635.27,1723.78 D3.2 750.26,1252.15 L2.1
NetJ2_1: J2.1 U9.10 | length 857.7
  Top Layer w10: v1@2871.96,2055.85 2864.96,2062.85 2864.96,2132.85 2899.28,2167.17 U9.10
  Bottom Layer w20: v1@2865.46,2053.35 3164.96,1753.85 J2.1
  other v1: 2867.96,2055.85
NetJ2_2: J2.2 U9.11 | length 894.4
  Top Layer w10: U9.11 3008.87,2192.76 3099.96,2283.85 3366.96,2283.85 v3(3367.96,2284.85)
  Bottom Layer w10: J2.2 J2.2@3399.96,1904.85
  Bottom Layer w20: v3(3367.96,2284.85) 3475.96,2176.85 3475.96,1979.85 J2.2
NetJ5_1: J5.1 U9.6 | length 566.3
  Top Layer w10: U9.6 3070.91,2064.8 v1(3075.96,2069.85)
  Bottom Layer w20: v1(3075.96,2069.85) J5.1
NetJ5_2: J5.2 U9.8 | length 635.9
  Top Layer w10: U9.8 3021.09,2115.98 v1(3080.96,2175.85)
  Bottom Layer w20: v1(3080.96,2175.85) 3080.96,2224.85 J5.2
NetL1_1: L1.1 R4.2 | length 100
  Top Layer w50: R4.2 L1.1
NetL3_1: L3.1 R20.1 | length 446.2
  Top Layer w50: R20.1 870.26,530.15 ; 883.96,543.85 870.26,530.15 ; L3.1 954.96,614.85 870.26,530.15
NetR1_1: R1.1 U1.37 | length 273.6
  Top Layer w10: R1.1 R1.1@1960.54,1302.43 ; v2(1959,1465.37) 1959.46,1464.91 1960.54,1464.91 U1.37 ; v2@1962,1358.37 v2(1958,1362.37) 1958,1315.81 R1.1@1963.96,1309.85
  Bottom Layer w10: v2(1959,1465.37) 1959,1361.37 v2@1962,1358.37
NetR2_1: R2.1 U1.94 | length 386.9
  Top Layer w10: R2.1 1672,2446 1862.11,2255.89 U1.94
NetR6_1: R6.1 U4.39 | length 690.4
  Top Layer w10: R6.1 1410.96,708.85 1482.96,636.85 1596.96,636.85 1664.96,704.85 1664.96,754.33 1830.87,920.24 U4.39
NetR11_2: R11.2 U4.20 | length 662.5
  Top Layer w10: U4.20 1791.5,675.87 v2(1826,710.37) ; v2@2153.96,941.85 R11.2 ; R11.2@2205.88,993.77 ccw(c2187.8,1011.85) R11.2@2213.37,1011.85
  Bottom Layer w10: v2@1825.22,707.59 1827,709.37 1840,722.37 1868.37,722.37 2089.25,943.25 v2@2147.96,943.25
  other v2: 2147.96,943.85
NetR12_2: R12.2 U4.21 | length 1109.6
  Top Layer w10: U4.21 1811.18,657.55 1836,682.37 1837.6,682.37 1839.6,684.37 v2(1881,684.37) ; R12.2 2223.96,1173.33 2252,1201.37 v2(2285,1201.37)
  Bottom Layer w10: v2(1881,684.37) 1881,697.37 2092,908.37 2273,908.37 2342,977.37 2342,1144.37 v2(2285,1201.37)
NetR13_1: R13.1 R15.2 | length 110
  Top Layer w50: R15.2 R13.1
NetR13_2: R13.2 U4.24 | length 809
  Top Layer w10: U4.24 1982.21,601.58 2064,683.37 2064,917.37 2106,959.37 v2(2106,1029.37) ; v2@2102.85,1141.85 v2(2106,1145)
  Top Layer w20: R13.2 v2@2102.85,1141.85
  Bottom Layer w10: v2(2106,1029.37) v2(2106,1145)
NetR16_1: R16.1 U4.28 | length 1580.1
  Top Layer w10: U4.28 1982,739.37 ; 1988.48,739.37 1982,739.37 ; v2(2030,766.85) 2002.52,739.37 1982,739.37
  Bottom Layer w10: v2(2030,766.85) 2040.96,766.85 2064.96,742.85 2064.96,565.85 2173.96,456.85 2818.85,456.85 3118.85,756.85 R16.1@3154.85,756.85
NetR17_1: R17.1 U4.26 | length 1461.8
  Top Layer w10: U4.26 2024.81,700 v2(2027.96,696.85)
  Bottom Layer w10: v2(2027.96,696.85) 2027.96,562.85 2169.96,420.85 2836.85,420.85 3072.85,656.85 R17.1@3118.85,656.85
NetR19_2: R19.2 U5.4 W1.1 | length 716.4
  Top Layer w20: U5.4 622.75,1857.64 679.96,1914.85 679.96,2121.85 R19.2
  Top Layer w50: W1.1 571.96,2229.85 R19.2
NetR21_1: R21.1 U1.67 | length 860
  Top Layer w10: U1.67 v1@2434.67,1953.67 ; v1(2346.8,2311.2) R21.1
  Bottom Layer w10: v1(2346.8,2311.2) 2346.8,2236.8 2393,2190.61 2393,1999.22 v1@2435.61,1956.61
  other v1: 2437,1956
NetR21_2: R21.2 U11.2 | length 529.6
  Top Layer w10: R21.2 2346.8,2801.8 2389,2844 2681,2844 2702,2865 U11.2
NetR23_1: R23.1 U1.58 | length 1049.7
  Top Layer w10: U1.58 2406.5,1776.5 2467,1837 v1@2467,1846 ; v1(2475,2379) 2475,2437 2601.8,2563.8 R23.1
  Bottom Layer w10: v1@2475,1845 v1@2475,2372
  other v1: 2474,1846
NetR23_2: R23.2 U12.2 | length 591.7
  Top Layer w10: R23.2 2601.8,2781.8 2636,2816 2986,2816 3032,2862 U12.2
NetR25_2: R25.2 U7.2 | length 1240
  Top Layer w20: v1(1165,2942) 1177.2,2929.8 R25.2 ; v1(1862.5,3250.5) 1889,3224 U7.2
  Bottom Layer w20: v1(1165,2942) 1165,3237 1211,3283 1830,3283 v1(1862.5,3250.5)
NetR26_1: R26.1 U1.90 U7.6 | length 1264.9
  Top Layer w10: R26.1 v1(1488.2,2723.8) ; v1(1713.8,2723.8) 1752.8,2723.8 1839,2810 U7.6 ; 1752.8,2721.2 1940.85,2533.15 U1.90
  Bottom Layer w10: v1(1488.2,2723.8) v1(1713.8,2723.8)
NetR27_2: R27.2 U8.2 | length 570.7
  Top Layer w20: R27.2 v1(1292.2,3077.2) ; v1@1531,3238 1560,3209 U8.2
  Bottom Layer w20: v1(1292.2,3077.2) 1340,3125 1340,3206 1375,3241 v1@1524,3241
  other v1: 1528,3241
NetR28_1: R28.1 U1.91 U8.6 | length 1284.3
  Top Layer w10: R28.1 1343.65,2840.35 1411,2773 1473,2773 1510,2810 U8.6 ; 1512,2845 1921.17,2435.83 U1.91
NetR29_2: R29.2 U10.2 | length 2012.9
  Top Layer w20: v1(1159,2665) 1174.2,2649.8 R29.2 ; v1(2195,3314) 2195,3273 2221,3247 U10.2
  Bottom Layer w20: v1(1159,2665) 1159,2720 1114,2765 1114,3264 1181,3331 2178,3331 v1(2195,3314)
NetR30_1: R30.1 U1.89 U10.6 | length 1633.4
  Top Layer w10: R30.1 1340.65,2580.65 1429,2669 v1(1550,2669) ; v1@1960.06,2669.94 2171,2880.89 U10.6 ; U1.89 v1(1960.54,2669.46)
  Bottom Layer w10: v1(1550,2669) v1@1955,2669
NRST: C19.2 R7.1 U4.29 | length 1071.2
  Top Layer w10: v2(1328.96,405.85) 1328.96,277.85 C19.2 ; v2(1574.96,514.85) 1574.96,583.85 1731.39,740.28 1866.99,740.28 1885.76,759.06 U4.29
  Top Layer w50: R7.1 C19.2
  Bottom Layer w10: v2(1328.96,405.85) 1437.96,514.85 v2(1574.96,514.85)
PFB: C14.2 C15.2 C16.2 C17.2 U4.18 U4.23 U4.37 | length 2924.8
  Top Layer w10: v2(1138,904.37) 1141,904.37 1190,953.37 1274.48,953.37 1334,893.85 ; C17.2@1381.53,903.42 C17.2 1509.96,1031.85 C16.2 1509.96,1180.33 1581.96,1252.33 1581.96,1288.85 C14.2 ; U4.18 1752.13,560.24 1806,506.37 1870,506.37 v2(1890,526.37) 1888,526.37 1850.55,563.82 U4.23 1850.55,635.35 ; v2(1755,1089.37) 1755,1087.81 1821,1087.81 1870.24,1038.58 U4.37
  Top Layer w50: C15.2 1334,893.85 C17.2
  Bottom Layer w10: v2(1581.96,1241.37) 1583,1241.37 1736.56,1087.81 1755,1087.81 v2(1755,1089.37)
  Bottom Layer w15: v2@1139,904.37 1139,502 1306.63,334.37 1698,334.37 v2(1890,526.37)
PULS_OUT: J8.7 R22.1 U11.6 | length 699
  Top Layer w20: R22.1 2552.8,3256.8 2622,3326 2727,3326 2752,3351 ; U11.6 2752,3351 ; J8.7 2834,3433 2752,3351
RD+: R8.2 RJ45.3 U4.14 | length 1477.4
  Top Layer w10: U4.14 1673.39,543.43 1781.44,435.37 2004.48,435.37 2199.96,630.85 v2(2306.96,630.85) ; R8.2@2215.68,706.57 R8.2 v2@2312.96,625.85
  Bottom Layer w10: v2@2300.96,627.85 v2@2306.97,627.87 ; v2(2306.96,630.85) 2821.96,630.85 RJ45.3@2822.96,629.85
RD-: R9.1 RJ45.6 U4.13 | length 1417
  Top Layer w10: U4.13 1653.7,519.11 1758.44,414.37 2217.44,414.37 R9.1 2356,356.85 2610,610.85 2610,691 RJ45.6@2698.85,779.85
RX1: U1.69 U9.18 | length 456.3
  Top Layer w10: U1.69 2383.15,1993.04 2582.87,2192.76 U9.18
RX3: U1.56 U9.21 | length 755.1
  Top Layer w10: U1.56 2416.24,1737.13 2473.96,1794.85 2583.96,1794.85 v1@2661.46,1872.35 ; v1(2591.96,2081.85) 2626.09,2115.98 U9.21
  Bottom Layer w10: v1(2591.96,2081.85) 2591.96,2040.85 2663.96,1968.85 v1(2663.96,1869.85)
RXD0: U1.33 U4.43 | length 994.4
  Top Layer w10: v2@1575,1410.37 1590,1425.37 1855,1425.37 1881.8,1452.17 U1.33 ; v2@1712,1050.37 1707,1045.37 v2(1707,1043.37) 1738,1043.37 1752.13,1029.24 U4.43
  Bottom Layer w10: v2(1576,1411.37) 1576,1308.37 1544,1276.37 1544,1206.37 v2(1707,1043.37)
RXD1: U1.34 U4.44 | length 1429.7
  Top Layer w10: v2@1532,1366.37 1548,1382.37 1862,1382.37 1901.48,1421.85 U1.34 ; v2(1731,891.37) 1732.44,892.81 U4.44
  Bottom Layer w10: v2@1525.5,1373.87 1367,1215.37 1367,1058.37 1403.52,1021.85 1600.52,1021.85 v2(1731,891.37)
  other v2: 1528,1371.37
SWCLK: J1.1 U1.76 | length 746.9
  Top Layer w10: U1.76 2216.96,2190.41 v1(2216.96,2352.85)
  Bottom Layer w10: v1(2216.96,2352.85) 2353.96,2489.85 J1.1
SWDIO: J1.2 U1.72 | length 1088.9
  Top Layer w10: v1@2155.96,2052.09 U1.72
  Bottom Layer w10: v1@2160.96,2047.85 v1(2155.96,2052.85) 2155.96,2176.85 2395.11,2416 2529.67,2416 2530.82,2414.85 2768.96,2414.85 J1.2
TD+: R10.2 RJ45.1 U4.17 | length 1647.6
  Top Layer w10: U4.17 1732.44,548.37 1797.44,483.37 1937,483.37 2100,646.37 2093,653.37 2093,834.89 2170.96,912.85 R10.2
  Bottom Layer w10: v2(2093.96,647.37) 2211.48,529.85 RJ45.1@2822.96,529.85
TD-: R14.1 RJ45.2 U4.16 | length 1430
  Top Layer w10: U4.16 1712.76,535.06 1789.44,458.37 1955.48,458.37 2157.96,660.85 2157.96,747.85 R14.1 ; R14.1@2205.88,795.77 ccw(c2187.8,813.85) R14.1@2213.37,813.85
  Bottom Layer w10: v2@2153.96,659.85 2233.96,579.85 ; 2233.85,579.85 2233.96,579.85 ; RJ45.2@2722.96,579.85 2233.96,579.85
  other v2: 2156.96,662.85
TX1: U1.68 U9.19 | length 453.9
  Top Layer w10: U1.68 2395.35,1973.35 2589.17,2167.17 U9.19
TX3: U1.55 U9.23 | length 831.9
  Top Layer w10: U1.55 2449.56,1717.45 2492.96,1760.85 2573.96,1760.85 2589.96,1776.85 2591.42,1776.85 2608.42,1793.85 v1(2738.96,1793.85) ; U9.23 v1(2741.96,2065.85) v1@2740.96,2055.85
  Bottom Layer w10: v1@2738.96,2062.85 v1(2741.96,2065.85)
  Bottom Layer w20: v1(2738.96,1793.85) v1@2738.96,2062.85
TX_EN: U1.48 U4.2 | length 1262.3
  Top Layer w10: v2@1504,950.37 1504,913.37 1540.2,877.17 U4.2 ; v2(1504.52,953.85) 1504.52,1000.95 1553,1049.43 1553,1168.27 1564.58,1179.85 1565.48,1179.85 1630,1244.37 1630,1332.37 1653,1355.37 1882,1355.37 1957,1430.37 v1(2047,1430.37) 2110,1430.37 2115.7,1436.07 2177.07,1497.44 U1.48
  Bottom Layer w10: v2@1498,960.37 v2(1504.52,953.85) v2@1512.96,953.85 ; v1@2038,1439.37 v1(2047,1430.37)
TXD0: U1.51 U4.3 | length 1521.5
  Top Layer w10: U4.3 1614.11,857.48 1635,878.37 v2(1635,909.37) ; v2@2295.18,1537.37 U1.51
  Bottom Layer w10: v2(1635,909.37) 1661.63,909.37 1821,750 1862,750 2053,941 2053,1337.37 2126.48,1410.85 2229.18,1410.85 2295.18,1476.85 2294,1478.03 v2(2294,1537.37)
TXD1: U1.52 U4.4 | length 2389.7
  Top Layer w10: v2@1443,877.37 1482.57,837.8 U4.4 ; U1.52 2358.98,1658.39 2405,1612.37 2405,1482.37 v2(2347,1424.37)
  Bottom Layer w10: v2(1442,877.37) 1403,877.37 1372,846.37 1372,730.37 1471,631.37 1534.6,631.37 ; 1535.6,630.37 1534.6,631.37 ; v2@2345,1424.37 2345,1228.37 2398,1175.37 2398,990.37 2285,877.37 2100.37,877.37 1985,762 1985,713.37 1903,631.37 1534.6,631.37
ZIN: J8.5 U10.3 | length 717.4
  Top Layer w20: 2137,3273 2137,3328 2176,3367 2480,3367 2534,3421 J8.5 ; 2139,3271 2171,3239 U10.3
pads on no net: RJ45.0 U1.1 U1.2 U1.3 U1.4 U1.5 U1.7 U1.8 U1.9 U1.13 U1.15 U1.17 U1.18 U1.23 U1.26 U1.29 U1.30 U1.31 U1.35 U1.36 U1.38 U1.39 U1.40 U1.41 U1.42 U1.43 U1.44 U1.45 U1.46 U1.47 U1.53 U1.54 U1.57 U1.59 U1.60 U1.61 U1.62 U1.63 U1.64 U1.65 U1.66 U1.70 U1.71 U1.77 U1.78 U1.79 U1.80 U1.82 U1.83 U1.84 U1.85 U1.86 U1.87 U1.88 U1.92 U1.93 U1.95 U1.96 U1.97 U1.98 U2.1 U3.1 U4.1 U4.5 U4.6 U4.7 U4.8 U4.9 U4.10 U4.11 U4.12 U4.25 U4.27 U4.33 U4.38 U4.41 U4.42 U4.45 U4.46 U6.4 U7.1 U7.4 U7.7 U8.1 U8.4 U8.7 U9.5 U9.7 U9.9 U9.12 U9.16 U9.17 U9.20 U9.22 U9.24 U10.1 U10.4 U10.7 U11.1 U11.4 U11.7 U12.1 U12.4 U12.7

## Polygon pours and split planes (outlines as drawn)
GND on Bottom Layer "Top Layer-No Net" (hatched 90Degree grid 16 track 10, remove dead copper, pour order 6): 30,3788 3615,3788 3614,3787 3614,1035 2590,1035 2591,1034 2591,377 3614,377 3615,376 3615,32 33,32
GND on Bottom Layer "Top Overlay-No Net" (solid, remove dead copper, pour order 4): 32,2723 34,2725 835,2725 835,988 836,987 834,985 29,985
GND on Top Layer "Top Layer-No Net" (hatched 90Degree grid 16 track 10, remove dead copper, pour order 8): 31,3787 32,3786 3615,3786 3615,1034 3616,1033 3612,1029 2595,1029 2595,384 2599,380 3614,380 3614,32 3613,31 32,31

## Keep-outs
Keep-Out Layer:
  circle w10: c314.96,3622.05 r86.61
  circle w10: c314.96,196.85 r86.61
  circle w10: c3267.39,196 r86.61
  circle w10: c3267.72,3622.05 r86.61
  lines w20: 0,0 3645.67,0 3645.67,3818.9 0,3818.9 0,0

## Other copper
Top Layer:
  region net 5V: 942,3544 963,3557 964,3557 999,3522 977,3495
  region net 5V: 902,3502 898,3508 882,3528 917,3563 921,3560 942,3544 940,3546 941,3543
  region net 5V: 635,3543 667,3567 702,3532 677,3495
  region net 5V: 618,3537 575.5,3528.5 577,3527 577,3479 619,3471 612,3479 620,3471
  region net 5V: 293,3350 310,3374 320,3387 314,3385 281,3418 268,3406 282,3418 241,3388
  region net GND: 1768,1758 1768,1761 1763,1749 1769,1743 1782,1746 1780,1747
  region net GND: 1863,1718 1864,1718.33 1871.6,1723.4 1861,1734 1860,1734 1856,1725 1855,1725
  region net NetC12_2: 1859,1827 1866,1835 1864,1835 1847,1836 1851,1827
  region net MDC: 1759,1835 1755,1842 1762,1849 1763,1848 1772,1846
Bottom Layer:
  region net GND: 1806,1773 1816,1771 1815,1771 1815,1761 1806,1758
  region net GND: 1797,1789 1805,1789 1806,1773 1793,1785
  region net GND: 1871.21,1759.21 1863,1763.78 1863,1763 1857,1757 1858,1752 1860,1748
  region net MDC: 1767,1817 1758,1811 1759,1812 1753,1818 1758,1828

## Silkscreen, mask and mechanical layers (free items; w line width, h text height)
Top Overlay:
  drawing of 852 lines, arcs and shapes, not listed
  text "GND" at 2017,3692 h48
  text "AIN" at 1867,3691 h48
  text "BIN" at 2173,3691 h48
  text "5V" at 580,3689 h48
  text "GND" at 724,3689 h48
  text "5V" at 895,3689 h48
  text "GND" at 1026,3689 h48
  text "5V" at 1198.2,3689 h48
  text "5V" at 1499,3689 h48
  text "GND" at 1622,3689 h48
  text "GND" at 1329,3687 h48
  text "GND" at 2323,3687 h48
  text "ZIN" at 2482,3687 h48
  text "GND" at 2636,3686 h48
  text "P" at 2819,3684 h48
  text "D" at 2960,3683 h48
  text "VIN" at 341,3276 h60
  text "V+" at 79,3126 h60
  text "VOUT" at 3323,3117 h60
  text "GND" at 3616,2945 h48 r90
  text "V-" at 79,2908 h60
  text "V+" at 3616,2814 h48 r90
  text "GND" at 3616,2638 h48 r90
  text "GND" at 2974,2581 h48 r90
  text "3.3V" at 3077,2580 h48 r90
  text "SDIO" at 2868,2579 h48 r90
  text "SWCLK" at 2771,2573 h48 r90
  text "RX3" at 3616,2470.5 h48 r90
  text "TX3" at 3616,2297 h48 r90
  text "RS232" at 3268,2175 h60
  text "GND" at 3616,1988 h48 r90
  text "RX1" at 3616,1833 h48 r90
  text "TX1" at 3616,1678 h48 r90
  text "GND" at 3616,1509 h48 r90
  text "V+" at 3616,1362 h48 r90
  text "VOUT" at 3307,1256 h60
  text "Size:97mmX93mm" at 2460,147 h48
  text "2018-4-19 By LWL" at 1206,58 h48
  text "Location Hole:87mmX75mm" at 2048,58 h48

## Text inside footprints (layer, text, board x,y; h text height)
D2: Top Overlay "2" at 252.02,2628.46 h31.5 r180; Top Overlay "1" at 345.32,2629.44 h31.5 r180